# Altium PCB AltiumDesigner - PCB.pcbdoc
Units mil, origin at the board's own origin, x right, y up, seen from the top; angles counter-clockwise.
Board outline 3309.84 x 2688.34 mil, 2 copper layers (Top Layer, Bottom Layer); 69 components, 65 nets, 305 pads, 112 vias.
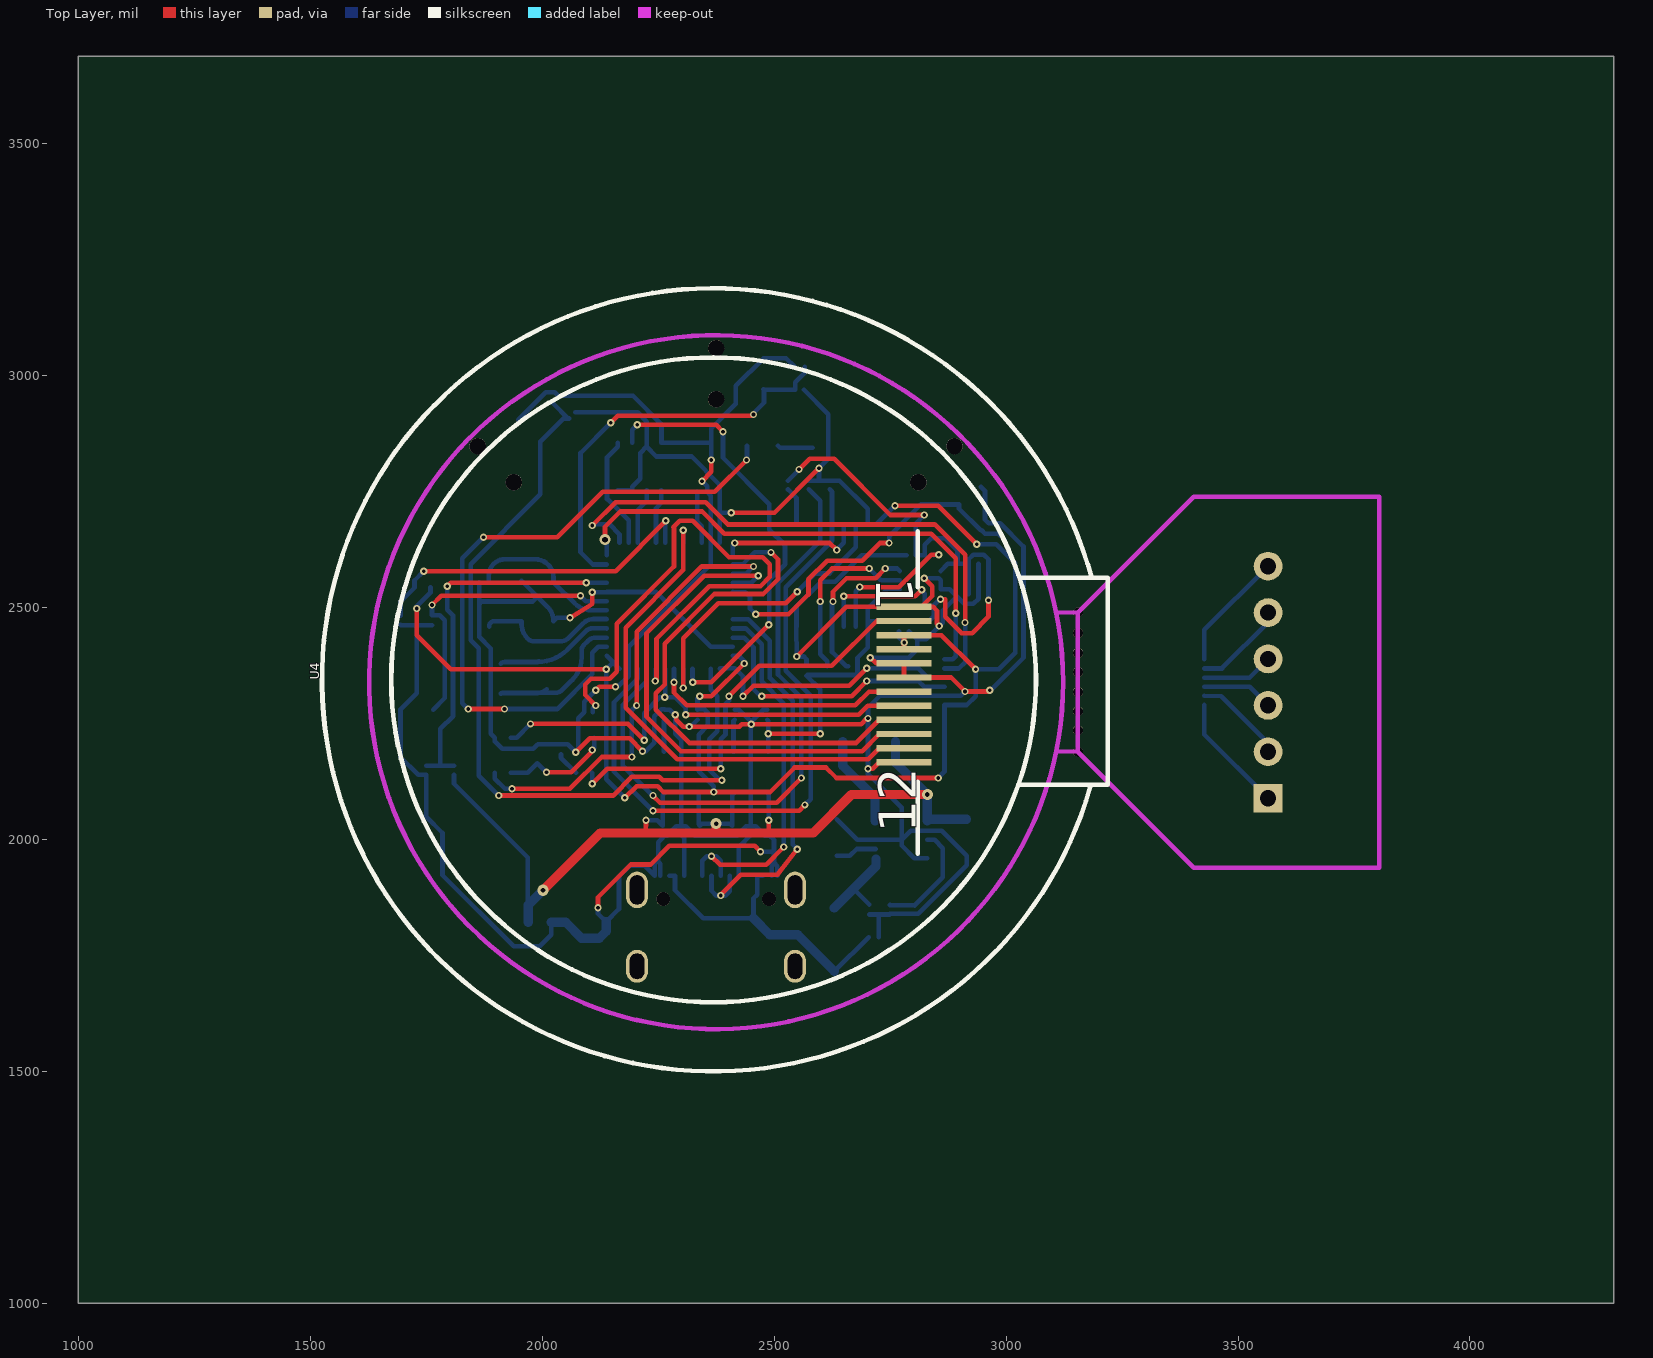
[diagram p0: Top Layer view]
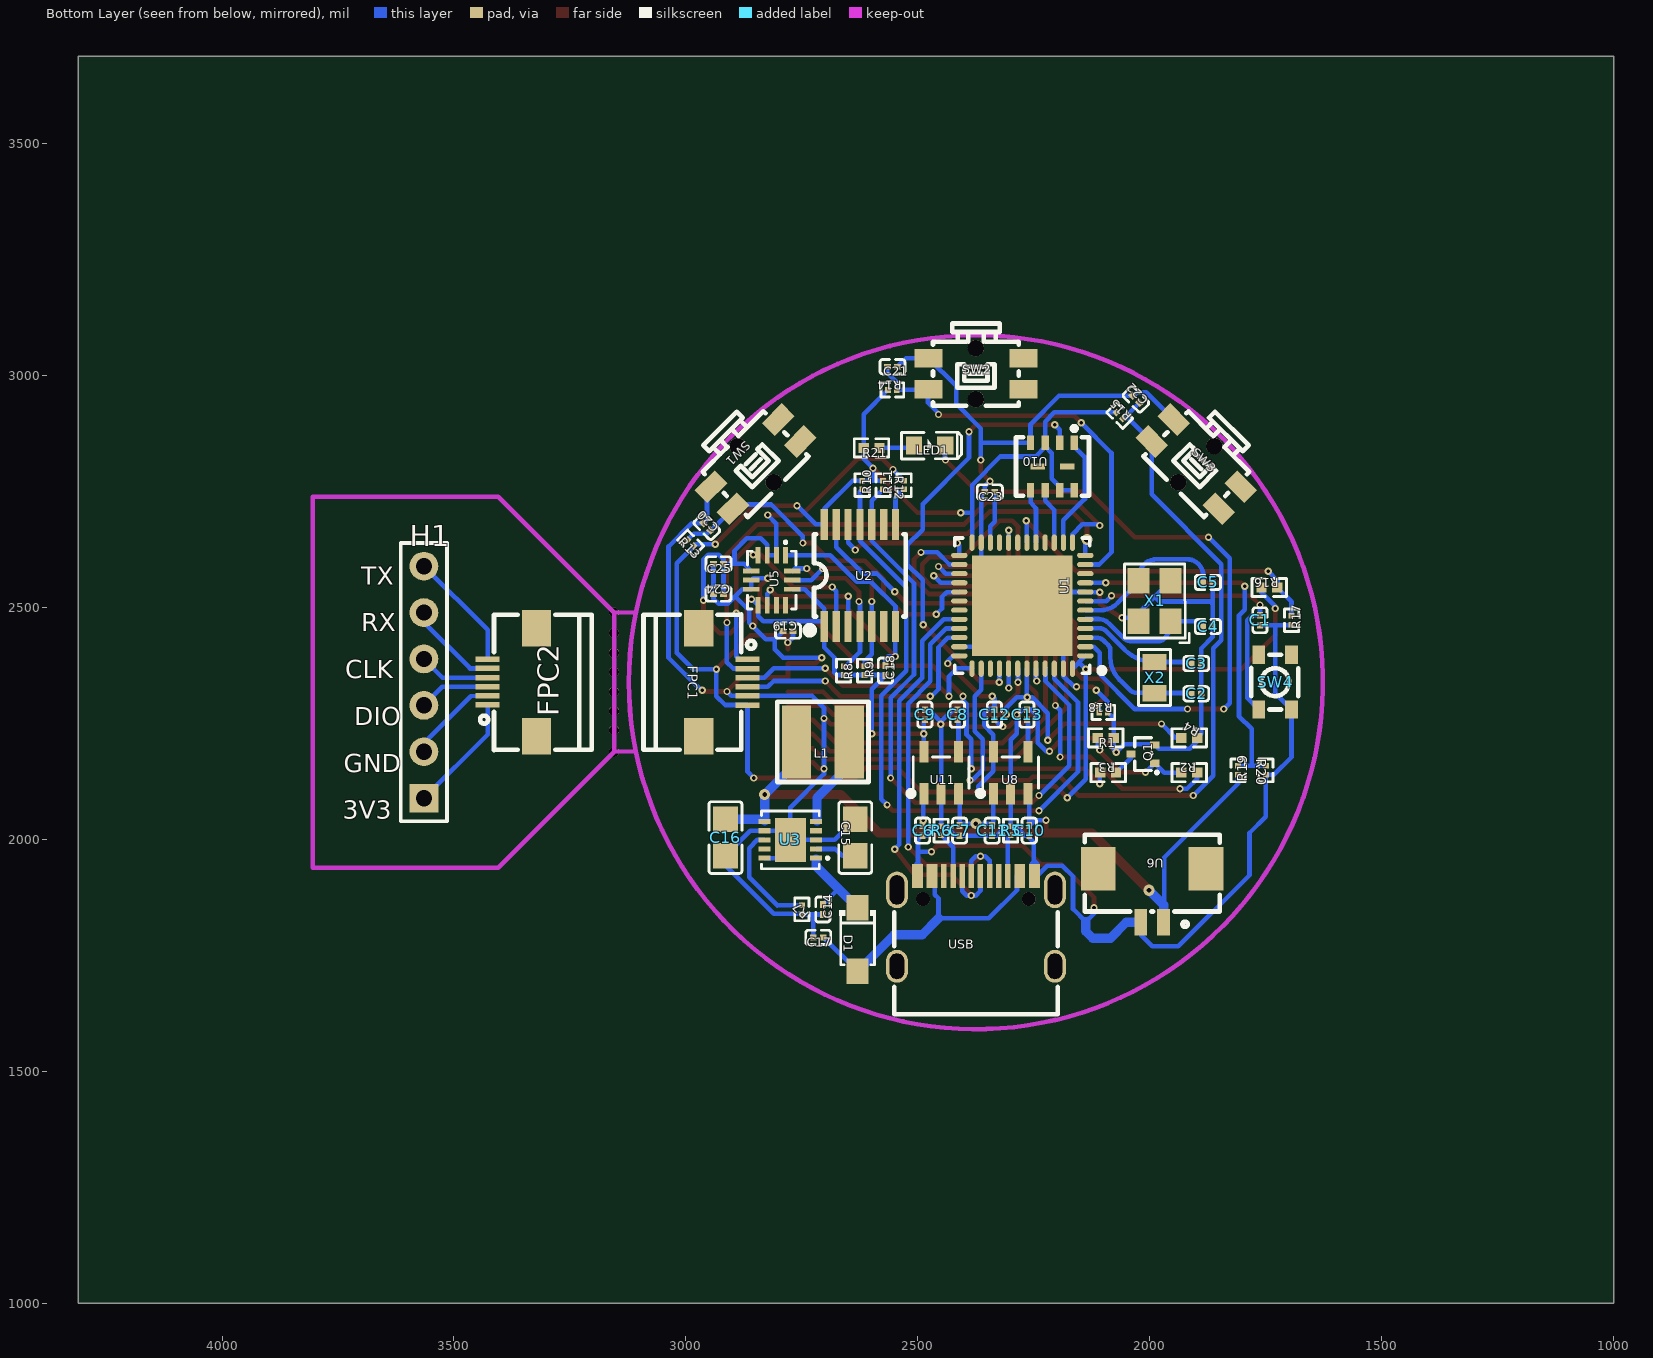
[diagram p1: Bottom Layer view, seen from below]

## Layer stack, top to bottom
Top Layer: signal copper (thickness not stored)
Dielectric: dielectric 12.6, FR-4, Dk 4.8
Bottom Layer: signal copper (thickness not stored)

## Board outline
4309.84,1000 1000,1000 1000,3688.34 4309.84,3688.34

## Components (designator, comment, footprint, x,y, rotation, side; value= is the part's Value field where it differs from the comment)
C1 "100nF" C0201 1762.48,2472.72 r270 bottom
C2 "9pF" C0201 1899.84,2314.16 r180 bottom
C3 "9pF" C0201 1899.84,2379.16 r180 bottom
C4 "20pf" C0201 1874.84,2459.16 r180 bottom
C5 "20pf" C0201 1874.84,2554.16 r180 bottom
C6 "1u" C0201 2489.84,2019.16 r270 bottom
C7 "1u" C0201 2409.84,2019.16 r270 bottom
C8 "1u" C0201 2414.84,2269.16 r90 bottom
C9 "1u" C0201 2484.84,2269.16 r90 bottom
C10 "1u" C0201 2259.84,2019.16 r270 bottom
C11 "1u" C0201 2339.84,2019.16 r270 bottom
C12 "1u" C0201 2334.84,2269.16 r270 bottom
C13 "22nf" C0201 2264.84,2269.16 r270 bottom
C14 "0.1u" C0201 2704.84,1849.16 r270 bottom
C15 "47u" C0805 2634.84,2004.16 r90 bottom
C16 "10u" C0805 2914.84,2004.16 r270 bottom
C17 "2.2u" C0201 2714.84,1789.16 r0 bottom
C18 "100nf" C0201 2569.84,2364.16 r270 bottom
C19 "100nf" C0201 2779.84,2449.16 r180 bottom
C20 "0.1u" C0201 2954.84,2674.16 r225 bottom
C21 "0.1u" C0201 2554.84,3019.16 r0 bottom
C22 "0.1u" C0201 2029.84,2949.16 r225 bottom
C23 "4.7u" C0201 2344.84,2749.16 r0 bottom
C24 "100nf" C0201 2929.84,2529.16 r180 bottom
C25 "100nf" C0201 2929.84,2594.16 r0 bottom
D1 "MBR230LSFT1G" SOD-123FL_L2.7-W1.8-LS3.8-RD 2629.84,1784.16 r90 bottom
FPC1 "AFC01-S06FCA-00" FPC-SMD_P0.50-6P_AFC01-S06FCA-00 2919.84,2339.16 r90 bottom
FPC2 "AFC01-S06FCA-00" FPC-SMD_P0.50-6P_AFC01-S06FCA-00 3374.84,2339.16 r270 bottom
H1 "HDR-F-2.54_1x6" HDR-F-2.54_1X6 3564.84,2289.16 r270 bottom
L1 "2.2uH" IND-SMD_L4.0-W4.0_VLCF4024-2 2704.96,2210.64 r0 bottom
LED1 "LED-0603_G" LED0603_GREEN 2474.84,2849.16 r0 bottom
Q1 "DMG1012T-7" SOT-523-3_L1.6-W0.8-P1.00-LS1.6-BR 2014.84,2184.16 r0 bottom
R1 "10kΩ" R0402 2094.84,2219.16 r180 bottom
R2 "1K" R0402 1914.84,2144.16 r180 bottom
R3 "10Ω" R0402 2089.84,2144.16 r180 bottom
R4 "10kΩ" R0402 1914.84,2219.16 r0 bottom
R5 "5.1K" R0201 2299.84,2019.16 r90 bottom
R6 "5.1K" R0201 2449.84,2019.16 r90 bottom
R7 "100k" R0201 2749.84,1849.16 r270 bottom
R8 "10k" R0201 2659.84,2364.16 r270 bottom
R9 "10k" R0201 2614.84,2364.16 r270 bottom
R10 "10k" R0201 2619.84,2764.16 r270 bottom
R11 "10k" R0201 2574.84,2764.16 r270 bottom
R12 "10k" R0201 2529.84,2764.16 r90 bottom
R13 "10k" R0201 2989.84,2639.16 r45 bottom
R14 "10k" R0201 2554.84,2969.16 r180 bottom
R15 "10k" R0201 2064.84,2914.16 r225 bottom
R16 "0" R0402 1742.32,2543.28 r180 bottom
R17 "10k" R0201 1694.44,2472.72 r270 bottom
R18 "5.1k" R0201 2099.84,2274.16 r180 bottom
R19 "100k" R0201 1809.84,2149.16 r270 bottom
R20 "100k" R0201 1749.84,2149.16 r90 bottom
R21 "550" R0402 2599.84,2844.16 r0 bottom
SW1 "EVQPUD02K" SW-SMD_EVQPUD02K-1 2849.84,2809.16 r225 bottom
SW2 "EVQPUD02K" SW-SMD_EVQPUD02K-1 2374.84,3004.16 r270 bottom
SW3 "EVQPUD02K" SW-SMD_EVQPUD02K-1 1899.84,2809.16 r315 bottom
SW4 "PTS830GM140SMTRLFS" KEY-SMD_4P-L3.0-W2.6-P1.80-LS3.5 1729.84,2339.16 r270 bottom
U1 "STM32F411CEU6" UFQFPN-48_L7.0-W7.0-P0.50-BL-EP 2274.84,2504.16 r270 bottom
U2 "LSF0204PWR" TSSOP-14_L5.0-W4.4-P0.65-LS6.4-BL 2624.84,2569.16 r0 bottom
U3 "ETA6096" TDFN-10_L3.0-W3.0-P0.50-BL-EP 2774.84,1999.16 r270 bottom
U4 "1.28‘’-12P-GC9A01" 1.28‘’-12P-GC9A01 2419.84,2334.16 r90 top
U5 "QMI8658C" LGA-14_L3.0-W2.5-P0.50-BR 2814.84,2559.16 r270 bottom
U6 "1.25MM*2P_W" CONN-SMD_1.25MM-2P_W 1994.84,1879.16 r180 bottom
U8 "RT9193-33GB" SOT-23-5_L3.0-W1.7-P0.95-LS2.8-BL 2299.84,2144.16 r0 bottom
U10 "W25Q32JVUUIQ" USON-8_L4.0-W3.0-P0.80-BL_WINBOND_UU 2209.84,2804.16 r180 bottom
U11 "TPRT9193-18GB" SOT-23-5_L3.0-W1.7-P0.95-LS2.8-BL 2449.84,2144.16 r0 bottom
USB "TYPE-C-31-M-12" USB-C_SMD-TYPE-C-31-M-12 2374.84,1824.16 r0 bottom
X1 "25MHz" OSC-SMD_4P-L3.2-W2.5-BL 1989.84,2514.16 r270 bottom
X2 "32.768kHz" OSC-SMD_L2.0-W1.2 1989.84,2349.16 r270 bottom

## Footprints (in the part's own frame and the unit in brackets; to place one, negate y for a bottom-side part, rotate by r counter-clockwise, add the part's x,y. Pads: shape width x height; smd on the part's side, far side on the other; paste and mask are expansions set on the pad)
1.28‘’-12P-GC9A01 [mm]
  rect 0.35x3 smd: 1(4.249,-9.144) 2(3.475,-9.144) 3(2.702,-9.144) 4(1.928,-9.144) 5(1.155,-9.144) 6(0.381,-9.144) 7(-0.393,-9.144) 8(-1.166,-9.144) 9(-1.94,-9.144) 10(-2.713,-9.144) 11(-3.487,-9.144) 12(-4.26,-9.144)
  silkscreen extent -21.18,-20.31 21.7,22.72
C0201 [mil]
  rect 14.51x12.76 smd: 1(10.8,0) 2(-10.8,0)
  silkscreen extent -27,-15 27,15
C0805 [mm]
  rect 1.41x1.35 smd: 1(1,0) 2(-1,0)
  silkscreen extent -1.96,-0.9 1.96,0.9
CONN-SMD_1.25MM-2P_W [mm]
  rect 0.7x1.45 smd: 1(0.625,-1.468) 2(-0.625,-1.468)
  rect 1.9x2.4 smd: 3(2.95,1.467) 4(-2.95,1.467)
  silkscreen extent -3.7,-1.71 3.7,3.33
FPC-SMD_P0.50-6P_AFC01-S06FCA-00 [mm]
  rect 0.3x1.3 smd: 1(1.248,-1.339) 2(0.748,-1.339) 3(0.248,-1.339) 4(-0.252,-1.339) 5(-0.752,-1.339) 6(-1.252,-1.339)
  rect 2x1.6 smd: 7(2.95,1.339) 8(-2.95,1.339)
  silkscreen extent -3.7,-1.75 3.72,4.36
HDR-F-2.54_1X6 [mil]
  rect 62x62 hole 35: 1(200,0)
  round 62 hole 35: 2(100,0) 3(0,0) 4(-100,0) 5(-200,0) 6(-300,0)
  silkscreen extent -350,-50 250,50
IND-SMD_L4.0-W4.0_VLCF4024-2 [mm]
  rect 1.6x4 smd: 1(1.445,0) 2(-1.445,0)
  silkscreen extent -2.5,-2.2 2.5,2.2
KEY-SMD_4P-L3.0-W2.6-P1.80-LS3.5 [mm]
  rect 1x0.7 smd: 1(1.5,-0.9) 2(-1.5,-0.9) 3(1.5,0.9) 4(-1.5,0.9)
  silkscreen extent -1.5,-1.3 1.5,1.27
LED0603_GREEN [mm]
  rect 0.9x1 smd: 1(0.85,0) 2(-0.85,0)
  silkscreen extent -1.75,-0.73 1.54,0.73
LGA-14_L3.0-W2.5-P0.50-BR [mm]
  rect 0.9x0.27 smd: 1(-1.37,0.75) 2(-1.37,0.25) 3(-1.37,-0.25) 4(-1.37,-0.75) 8(1.37,-0.75) 9(1.37,-0.25) 10(1.37,0.25) 11(1.37,0.75)
  rect 0.27x0.9 smd: 5(-0.5,-1.12) 6(0,-1.12) 7(0.5,-1.12) 12(0.5,1.12) 13(0,1.12) 14(-0.5,1.12)
  silkscreen extent -2.14,-1.33 1.58,1.33
OSC-SMD_4P-L3.2-W2.5-BL [mm]
  rect 1.4x1.2 smd: 1(1.1,0.875) 2(-1.1,0.875) 3(-1.1,-0.875) 4(1.1,-0.875)
  silkscreen extent -2.03,-1.65 2.29,1.9
OSC-SMD_L2.0-W1.2 [mm]
  rect 0.9x1.3 smd: 1(0.85,0) 2(-0.85,0)
  silkscreen extent -1.53,-0.88 1.53,0.88
R0201 [mil]
  rect 11.93x12.76 smd: 1(9.51,0) 2(-9.51,0)
  silkscreen extent -24,-15 24,15
R0402 [mm]
  rect 0.566x0.54 smd: 1(0.433,0) 2(-0.433,0)
  silkscreen extent -0.94,-0.5 0.94,0.5
SOD-123FL_L2.7-W1.8-LS3.8-RD [mm]
  rect 1.4x1.2 smd: 1(1.735,0) 2(-1.735,0)
  silkscreen extent -1.38,-1 1.6,1
SOT-23-5_L3.0-W1.7-P0.95-LS2.8-BL [mm]
  rect 0.49x1.157 smd: 1(0.95,1.154) 2(0,1.154) 3(-0.95,1.154)
  rect 0.49x1.175 smd: 4(-0.95,-1.154) 5(0.95,-1.154)
  silkscreen extent -1.53,-0.85 1.8,1.29
SOT-523-3_L1.6-W0.8-P1.00-LS1.6-BR [mm]
  rect 0.51x0.4 smd: 1(-0.65,0.5) 2(-0.65,-0.5) 3(0.65,0)
  silkscreen extent -0.83,-0.9 0.45,1.08
SW-SMD_EVQPUD02K-1 [mm]
  rect 1x1.55 smd: 1(0.85,-2.6) 2(-0.85,-2.6) 3(0.85,2.6) 4(-0.85,2.6)
  round 0.9 hole 0.9 unplated: ""(-1.4,0) ""(1.4,0)
  silkscreen extent -2.75,-2.35 1.75,2.35
TDFN-10_L3.0-W3.0-P0.50-BL-EP [mm]
  rect 0.28x0.665 smd: 1(1,1.407) 2(0.5,1.407) 3(0,1.407) 4(-0.5,1.407) 5(-1,1.407) 6(-1,-1.407) 7(-0.5,-1.407) 8(0,-1.407) 9(0.5,-1.407) 10(1,-1.407)
  rect 2.4x1.7 smd: 11(0,0)
  silkscreen extent -1.58,-1.58 1.58,2.11
TSSOP-14_L5.0-W4.4-P0.65-LS6.4-BL [mm]
  rect 0.4x1.7 smd: 1(1.95,2.8) 2(1.3,2.8) 3(0.65,2.8) 4(0,2.8) 5(-0.65,2.8) 6(-1.3,2.8) 7(-1.95,2.8) 8(-1.95,-2.8) 9(-1.3,-2.8) 10(-0.65,-2.8) 11(0,-2.8) 12(0.65,-2.8) 13(1.3,-2.8) 14(1.95,-2.8)
  silkscreen extent -2.5,-2.25 2.95,3.2
UFQFPN-48_L7.0-W7.0-P0.50-BL-EP [mm]
  oval 0.28x0.9 smd: 1(2.751,3.449) 2(2.25,3.449) 3(1.75,3.449) 4(1.25,3.449) 5(0.749,3.449) 6(0.249,3.449) 7(-0.249,3.449) 8(-0.749,3.449) 9(-1.25,3.449) 10(-1.75,3.449) 11(-2.251,3.449) 12(-2.751,3.449) 25(-2.751,-3.449) 26(-2.251,-3.449) 27(-1.75,-3.449) 28(-1.25,-3.449) 29(-0.749,-3.449) 30(-0.249,-3.449) 31(0.249,-3.449) 32(0.749,-3.449) 33(1.25,-3.449) 34(1.75,-3.449) 35(2.25,-3.449) 36(2.751,-3.449)
  oval 0.9x0.28 smd: 13(-3.449,2.751) 14(-3.449,2.25) 15(-3.449,1.75) 16(-3.449,1.25) 17(-3.449,0.749) 18(-3.449,0.249) 19(-3.449,-0.249) 20(-3.449,-0.749) 21(-3.449,-1.25) 22(-3.449,-1.75) 23(-3.449,-2.25) 24(-3.449,-2.751) 37(3.449,-2.751) 38(3.449,-2.25) 39(3.449,-1.75) 40(3.449,-1.25) 41(3.449,-0.749) 42(3.449,-0.249) 43(3.449,0.249) 44(3.449,0.749) 45(3.449,1.25) 46(3.449,1.75) 47(3.449,2.25) 48(3.449,2.751)
  rect 5.5x5.5 smd: 49(0,0)
  silkscreen extent -3.7,-3.7 3.7,4.5
USB-C_SMD-TYPE-C-31-M-12 [mm]
  oval 1.2x2 hole 0.8 slot 1.6 at 90 deg: 0(4.325,-1.706) 1(-4.325,-1.706)
  oval 1.2x1.8 hole 0.8 slot 1.4 at 90 deg: 2(-4.325,2.474) 3(4.325,2.474)
  rect 0.3x1.3 smd: A1(3.35,-2.474) A4(2.55,-2.474) A5(1.25,-2.474) A6(0.25,-2.474) A7(-0.25,-2.474) A8(-1.25,-2.474) A9(-2.55,-2.474) A12(-3.35,-2.474) B1(-3.05,-2.474) B4(-2.25,-2.474) B5(-1.75,-2.474) B6(-0.75,-2.474) B7(0.75,-2.474) B8(1.75,-2.474) B9(2.25,-2.474) B12(3.05,-2.474)
  round 0.75 hole 0.75 unplated: ""(-2.9,-1.206) ""(2.9,-1.206)
  silkscreen extent -4.47,-0.49 4.47,5.09
USON-8_L4.0-W3.0-P0.80-BL_WINBOND_UU [mm]
  rect 0.4x0.8 smd: 1(1.2,1.3) 2(0.4,1.3) 3(-0.4,1.3) 4(-1.2,1.3) 5(-1.2,-1.3) 6(-0.4,-1.3) 7(0.4,-1.3) 8(1.2,-1.3)
  rect 0.8x0.35 smd: 9(0.802,0) 10(-0.798,0)
  silkscreen extent -2,-1.6 2,2.21

## Free pads (board coordinates)
  round 21.65 hole 21.65 unplated: ""(3154.84,2189.16) ""(3154.84,2235.32) ""(3154.84,2276.32) ""(3154.84,2318.32) ""(3154.84,2361.32) ""(3154.84,2402.32) ""(3154.84,2445.32) ""(3154.84,2489.16)

## Via types
v1: diameter 15.75, hole 7.87, Top Layer to Bottom Layer, tented both sides, 103 vias
v2: diameter 15.77, hole 7.87, Top Layer to Bottom Layer, tented both sides, 5 vias
v3: diameter 24, hole 10, Top Layer to Bottom Layer, tented both sides, 3 vias
v4: diameter 24, hole 12, Top Layer to Bottom Layer, tented both sides, 1 vias

## Nets (pads, with @x,y where several pads share a name; then routed paths per layer and width w, separated by ;. In a path a pad name is that pad's centre, name@x,y a point inside that pad or via, vN(x,y) a via of type N, cw(c..) or ccw(c..) an arc to the next point about the centre after c; other vN are vias at no path point)
1V8: C9.2 C18.1 C24.1 C25.2 R8.1 R9.1 R12.1 U2.1 U5.2 U5.3 U5.5 U5.8 U5.12 U11.5 | length 1967.4
  Top Layer w10: v1(2487.24,2228.13) 2487.4,2228.28 v1(2599.12,2228.28) ; v1(2553.76,2797.8) 2576.44,2820.49 2629.36,2820.49 2750.32,2699.52 v1(2823.4,2699.52) ; v1(2858.68,2518.08) 2868.76,2518.08 2868.76,2480.28 2904.04,2445 2926.72,2445 2962,2480.29 v1(2962,2515.56)
  Bottom Layer w10: C9.2 2487.24,2255.96 v1(2487.24,2228.13) U11.5 ; R12.1 2553.76,2797.59 v1(2553.76,2797.8) ; v1(2599.12,2228.28) 2599.12,2324.08 C18.1 2571.13,2354.65 R9.1 R8.1 2675.09,2354.65 2679.76,2359.32 2679.76,2392.08 2701.61,2413.93 U2.1 ; U5.12 2744.04,2539.46 2701.64,2497.06 2701.64,2458.96 2702.84,2460.16 2702.84,2470.16 2833.44,2470.16 2844.34,2481.06 U5.8@2844.34,2505.26 ; v1(2823.4,2699.52) 2805,2681.13 U5.2 U5.3 ; U5.3@2824.64,2613.06 2824.64,2635.26 2838.54,2649.16 2868.74,2649.16 2895.24,2622.66 2895.24,2594.16 ; U5.8 2857.23,2518.08 v1(2858.68,2518.08) ; U5.5 2874.26,2594.16 C25.2 ; C24.1 C25.2 ; v1(2962,2515.56) 2962.04,2603.76 2951.94,2613.86 2929.24,2613.86 2919.04,2603.66 C25.2
3V3: C12.2 C19.1 FPC1.6 R10.2 R11.2 R13.2 R14.2 R15.2 R16.2 R21.1 U1.1 U1.24 U1.36 U1.48 U2.14 U4.3 U4.4 U8.5 U10.3 U10.7 U10.8 | length 4605.1
  Top Layer w10: v1(1729.72,2497.92) 1729.72,2439.96 1802.8,2366.88 2137.77,2366.88 v1(2137.96,2367.07) ; v1@2178.24,2089.66 2203.44,2114.86 2248.84,2114.86 2261.44,2102.26 v1(2369.8,2102.28) ; v1(2339.56,2308.92) 2364.76,2308.92 v1(2435.32,2379.48) ; v1(2369.8,2102.28) 2491.09,2102.28 2544.01,2155.2 2611.72,2155.2 2634.4,2132.52 v1(2853.64,2132.52) ; v1(2407.6,2704.56) 2500.84,2704.56 v1(2596.6,2800.32) ; v1(2760.4,2719.68) 2853.64,2719.68 v1(2936.8,2636.52) ; U4.4 U4.3 2860.64,2440.52 v1(2934.28,2366.88)
  Bottom Layer w10: v1@1729.74,2497.96 1729.74,2502.96 1759.34,2532.56 R16.2@1759.34,2543.26 ; R15.2@2071.54,2920.86 2206.04,2921.26 2225.54,2900.56 U10.3@2225.54,2855.36 ; U1.1 U1.48 ; 2152.9,2382.01 v1(2137.96,2367.07) 2137.96,2130 v1(2178.28,2089.68) ; U10.8 U10.7 ; U10.7 2194.14,2760.66 2211.04,2777.66 2211.04,2833.06 2225.54,2847.66 U10.3@2225.54,2855.36 ; U8.5 2337.24,2147.46 2369.84,2114.86 v1(2369.8,2102.28) ; U8.5 2337.24,2225.96 2357.2,2245.92 2357.2,2273.64 2349.64,2281.2 2336.08,2281.2 C12.2 2334.84,2304.2 v1(2339.56,2308.92) ; U1.24 2383.14,2764.26 2321.94,2825.56 2246.34,2825.56 2225.54,2846.26 U10.3@2225.54,2855.36 ; 2383.14,2704.36 v1(2407.6,2704.56) ; U1.36 2423.98,2395.86 2435.32,2384.52 v1(2435.32,2379.48) ; R14.2 2616.88,2916.63 R21.1 2616.88,2820.6 v1(2596.6,2800.32) 2596.6,2774.11 2597.04,2773.67 ; R11.2 R10.2 2640.89,2773.67 2701.61,2712.95 U2.14 2720.12,2679.4 v1(2760.4,2719.68) ; C19.1 2769.04,2436.36 v1(2780.56,2424.84) ; v1(2853.64,2132.52) 2867.11,2145.99 FPC1.6 2915.23,2289.87 2934.28,2308.93 v1(2934.28,2366.88) ; v1@2934.24,2366.86 2984.64,2366.86 3019.94,2402.16 3019.94,2595.56 R13.2@2983.14,2632.46 ; v1(2936.8,2636.52) 2979.04,2636.52 R13.2
_GND: FPC2.2 H1.2 | length 197.7
  Bottom Layer w10: FPC2.2@3427.54,2309.66 3463.44,2308.96 3564.84,2207.56 H1.2
_PA2: FPC2.6 H1.6 | length 257.6
  Bottom Layer w10: FPC2.6 3427.57,2451.89 H1.6
_PA3: FPC2.5 H1.5 | length 199.4
  Bottom Layer w10: FPC2.5@3427.54,2368.76 3465.34,2368.76 3564.84,2468.26 H1.5
_SWCLK: FPC2.4 H1.4 | length 153.9
  Bottom Layer w10: FPC2.4@3427.54,2349.06 3524.74,2349.06 H1.4
_SWDIO: FPC2.3 H1.3 | length 153.8
  Bottom Layer w10: FPC2.3@3427.54,2329.36 3524.94,2329.06 H1.3
BAT_ADC: R19.2 R20.1 U1.9 | length 810.7
  Top Layer w10: v1(1795.24,2545.8) 1802.8,2553.36 v1(2095.12,2553.36)
  Bottom Layer w10: R20.1 R19.2 ; 1780.24,2158.66 1780.24,2238.46 1807.84,2266.06 1807.84,2482.76 1795.24,2495.36 v1(1795.24,2545.8) ; v1(2095.12,2553.36) U1.9
FPC2_1: FPC2.1 H1.1 | length 257.7
  Bottom Layer w10: FPC2.1 3427.57,2226.43 H1.1
GND: C1.1 C2.1 C3.1 C4.1 C5.1 C6.1 C7.1 C8.1 C9.1 C10.1 C11.1 C12.1 C13.2 C14.1 C15.1 C16.1 C17.1 C18.2 C19.2 C20.2 C21.2 C22.2 C23.1 C24.2 C25.1 FPC1.5 Q1.2 R1.1 R4.2 R5.1 R6.1 R7.1 R17.1 R18.1 R20.2 SW1.2 SW2.2 SW3.2 SW4.3 U1.8 U1.23 U1.35 U1.47 U1.49 U2.7 U3.3 U3.7 U3.10 U3.11 U4.1 U4.5 U4.6 U4.12 U5.1 U5.6 U5.7 U6.2 U8.2 U10.4 U11.2 USB.A1 USB.A12 USB.B1 USB.B12 X1.2 X1.4 | length 10314.7
  Top Layer w10: v1(2059.84,2477.76) 2107.74,2507.96 v1(2107.72,2533.2) ; v1(2072.44,2187.96) 2102.68,2218.2 2188.36,2218.2 v1(2216.08,2190.48) ; v1(2115.28,2321.52) 2122.84,2329.08 v1(2158.12,2329.08) ; v1(2120.32,1852.8) 2120.34,1875.46 2190.84,1946.06 2233.74,1946.06 2274.04,1986.36 2458.04,1986.36 v1(2470.6,1973.76) ; v1(2286.64,2268.6) 2289.16,2266.08 2289.16,2258.54 2304.3,2243.4 v1(2316.88,2243.4) 2425.24,2243.4 2430.28,2248.44 v1(2450.44,2248.44) 2687.34,2248.46 2699.94,2261.06 v1@2702.44,2261.06 ; v1(2344.6,2772.6) 2364.76,2792.76 2364.76,2810.4 v1(2364.76,2817.96) ; v1(2548.72,2394.6) 2655.54,2501.46 U4.1@2779.84,2501.46 ; v1(2702.44,2152.68) 2712.54,2152.66 2726.24,2166.46 U4.12@2779.84,2166.46 ; v1(2707.48,2392.08) 2719.95,2379.61 U4.5 U4.6 2881.44,2349.16 v1(2911.6,2319) 2962,2319 v1(2964.52,2321.52) ; v1@2823.44,2563.46 2841.04,2545.76 2841.04,2524.86 2817.64,2501.46 U4.1@2779.84,2501.46 ; v1(2856.16,2460.12) 2851.12,2465.16 2851.12,2492.88 2842.57,2501.43 U4.1
  Bottom Layer w10: SW4.3 1729.71,2315.41 1729.71,2461.92 ; SW4.3 1694.44,2177.86 1732.64,2139.66 R20.2 1749.84,2049.36 1785.14,2014.06 1785.14,1923.36 1938.84,1769.66 1994.34,1769.66 2019.44,1794.76 U6.2 ; R17.1 1695.73,2461.92 C1.1 ; 1864.04,2507.48 1869.6,2513.04 1979.2,2513.04 1988.55,2522.39 1988.55,2524.33 ; C5.1 C4.1 1864.04,2436.68 1889.04,2411.68 C3.1 C2.1 1889.04,2227.92 R4.2 ; R4.2 1897.84,2211.36 1913.64,2195.56 1980.94,2195.56 1989.24,2203.86 1991.01,2205.6 2054.8,2205.6 v1(2072.44,2187.96) 2077.8,2193.32 R1.1 2077.8,2261.63 R18.1 2090.33,2296.58 v1(2115.28,2321.52) ; SW3.2@1948.54,2905.16 2007.44,2964.16 2027.04,2964.16 2034.44,2956.76 C22.2@2037.44,2956.76 ; X1.2 2011.76,2501.12 cw(c1981.49,2470.85) X1.4 ; X1.4 2031.24,2477.76 v1(2059.84,2477.76) ; C22.2 2195.69,2956.79 2257.08,2895.4 U10.4 ; v1(2107.72,2533.2) 2138.58,2533.2 U1.8 2245.35,2533.66 U1.49 ; v1(2120.32,1852.8) 2120.32,1840.19 2137.94,1822.57 2165.64,1850.26 2165.64,1920.86 2188.34,1943.56 2221.04,1943.56 2242.94,1921.56 2242.95,1948.21 2249.84,1955.1 ; v1(2158.12,2329.08) 2163.16,2329.08 2186.24,2352.16 U1.47 2186.24,2415.57 U1.49 ; v1@2216.04,2190.46 2223.64,2190.46 2241.24,2208.16 2241.24,2266.06 2256.44,2281.16 2263.64,2281.16 C13.2 2275.28,2279.97 v1(2286.64,2268.6) ; USB.B1@2254.74,1921.56 2254.74,1947.66 2249.84,1952.56 2249.84,1994.16 2259.84,2004.16 C10.1 2269.04,2008.36 2289.35,2028.67 R5.1 ; U10.4@2257.04,2855.36 2364.74,2855.36 2364.74,2817.96 2364.74,2885.96 2417.64,2938.96 2417.64,2978.06 SW2.2@2477.24,3037.66 ; v1(2286.64,2268.6) 2286.64,2228.26 2299.84,2215.06 2299.84,2098.76 R5.1 ; v1(2316.88,2243.4) 2319.88,2243.4 C12.1 ; v1(2344.6,2772.6) 2355.64,2761.56 C23.1 2363.44,2741.36 U1.23 2363.44,2592.77 U1.49 ; U1.35 2363.45,2415.56 U1.49 ; C8.1 2423.94,2279.96 v1@2450.44,2253.46 ; v1(2470.6,1973.76) 2478.16,1973.76 2498.13,1973.76 2499.84,1975.48 ; SW2.2 2525.58,3037.62 C21.2 ; C9.1 2476.94,2279.96 v1@2450.44,2253.46 ; USB.B12 2494.94,1944.26 2499.84,1949.16 2499.84,1999.16 C6.1 2480.64,2008.36 2460.33,2028.67 R6.1 ; 2499.84,1959.36 2499.84,1949.56 2506.74,1942.66 USB.A1 ; U2.7 2548.07,2502.31 2601.64,2555.88 2631.88,2555.88 2689.09,2613.09 U5.1 ; U2.7@2548.04,2458.96 v1(2548.72,2394.6) ; v1(2548.72,2394.6) 2563.84,2394.6 2569.84,2388.6 C18.2 ; C15.1@2634.84,2043.56 2679.44,1999.16 U3.3 U3.11 ; C14.1 2748.55,1838.36 R7.1 2810.25,1839.65 2914.84,1944.24 C16.1 ; v1(2707.48,2392.08) 2790.64,2392.08 2808.28,2409.72 2808.28,2431.52 ; C17.1@2725.14,1789.16 2725.14,1838.36 ; C19.2 2808.28,2431.52 ; v1(2823.4,2563.44) 2854.66,2563.44 U5.6 U5.7 2878.24,2539.46 2909.74,2507.96 2929.24,2507.96 2940.64,2519.36 C24.2 C25.1 ; U3.10@2830.24,1959.76 2802.14,1959.76 2774.84,1987.06 U3.11 ; v1(2856.16,2460.12) 2827.56,2431.52 2808.28,2431.52 ; v1@2856.14,2460.16 2863.74,2467.66 2863.74,2493.66 2893.84,2523.86 ; FPC1.5 2728.27,2309.55 2702.44,2283.72 v1(2702.44,2261.04) 2702.44,2141.24 2774.84,2068.84 U3.11 ; FPC1.5 2902.14,2309.56 v1(2911.6,2319) ; C16.1 2861.44,2018.86 2830.24,2018.86 2794.52,2018.84 U3.11 ; SW1.2@2945.84,2760.46 2954.44,2751.86 2954.44,2689.86 C20.2@2962.44,2681.76 ; C20.2 2987.29,2681.79 3037.6,2631.48 3037.6,2392.08 2967.04,2321.52 v1(2964.52,2321.52) ; R5.1 2309.84,2028.67 2330.15,2008.36 C11.1 C7.1 2419.04,2008.36 2439.35,2028.67 R6.1 ; R6.1 U11.2 2449.84,2247.84 v1(2450.44,2248.44) ; v1@2450.44,2248.46 v1@2450.44,2253.46 ; v1@2450.44,2248.46 v1@2450.44,2253.46
  Bottom Layer w20: U6.2 2050.84,1821.36 2084.94,1787.26 2122.84,1787.26 2137.94,1802.36 2137.94,1822.56
LED1_1: LED1.1 R21.2 | length 76.6
  Bottom Layer w10: LED1.1 2513.31,2844.16 R21.2
LEDK: R3.2 U4.2 | length 923.3
  Top Layer w10: v1(2107.72,2119.92) 2140.48,2152.68 v1(2384.92,2152.68) ; v1@2402.54,2308.96 2468.04,2374.46 2624.34,2374.46 2720.84,2470.96 U4.2
  Bottom Layer w10: R3.2 2107.72,2143.33 v1(2107.72,2119.92) ; v1(2384.92,2152.68) 2384.92,2215.68 2395.04,2225.81 2395.04,2291.96 2402.56,2299.48 v1(2402.56,2308.92)
NRST: C1.2 SW4.1 U1.7 | length 647
  Top Layer w10: v1(1762.48,2505.48) 1782.64,2525.64 v1(2082.52,2525.64)
  Bottom Layer w10: C1.2@1762.44,2483.56 1779.44,2483.56 1790.24,2472.76 1790.24,2305.06 SW4.1@1765.24,2280.06 ; C1.2 v1(1762.48,2505.48) ; v1(2082.52,2525.64) 2094.2,2513.96 U1.7
PA1: C21.1 R14.1 SW2.1 U1.11 | length 880.4
  Top Layer w10: v1(2148.04,2898.6) 2163.16,2913.73 2188.36,2913.73 2452.96,2913.73 v1(2455.48,2916.24)
  Bottom Layer w10: U1.11 2108.64,2592.77 2082.52,2618.88 2082.52,2833.09 v1(2148.04,2898.6) ; v1(2455.48,2916.24) 2455.48,2918.76 2478.16,2941.44 2478.16,2969.73 SW2.1 2478.73,2969.16 R14.1 2545.33,2985.93 2565.64,3006.24 C21.1
PA2: FPC1.1 U1.12 | length 1113.3
  Top Layer w10: v4(2135.44,2646.6) 2135.44,2674.36 2168.24,2707.06 2344.62,2707.06 2392.52,2659.16 2838.54,2659.16 2891.44,2606.27 v2(2891.44,2487.84)
  Bottom Layer w10: v4(2135.44,2646.6) 2139.04,2643 U1.12 ; FPC1.1 2885.14,2388.3 2891.44,2394.6 v2(2891.44,2487.84)
PA3: FPC1.2 U1.13 | length 1240.6
  Top Layer w10: v2(2107.72,2676.84) 2158.12,2727.25 2352.16,2727.25 2400.26,2679.15 2846.36,2679.15 2911.6,2613.9 v2(2911.6,2467.68)
  Bottom Layer w10: v2@2107.74,2676.86 2110.24,2679.36 2145.54,2679.36 2166.54,2658.36 U1.13 ; FPC1.2 2898.21,2368.62 2911.6,2382 v2(2911.6,2467.68)
PA4: U1.14 U10.1 | length 244
  Bottom Layer w10: U10.1 2162.6,2846.92 2139.84,2824.16 2139.84,2734.16 2186.24,2687.76 U1.14
PA5: U1.15 U10.6 | length 121.2
  Bottom Layer w10: U1.15 2205.94,2710.26 2225.59,2729.91 U10.6
PA7: U1.17 U10.5 | length 117.6
  Bottom Layer w10: U1.17 2245.34,2713.66 2257.04,2726.36 U10.5@2257.04,2752.96
PA8: C20.1 R13.1 SW1.1 U1.29 | length 783.4
  Top Layer w10: v2@2460.54,2485.36 2531.04,2485.36 2573.94,2528.16 2573.94,2560.96 2614.24,2601.26 2689.84,2601.26 2727.64,2639.06 v2@2747.84,2639.06
  Bottom Layer w10: U1.29 2437.84,2533.16 2447.94,2523.16 2447.94,2507.96 ; 2447.92,2507.94 2447.92,2497.92 v2(2460.52,2485.32) ; v2@2747.84,2639.06 2747.84,2654.16 2815.84,2722.16 2898.54,2722.16 SW1.1@2898.54,2713.16 ; SW1.1 2945.14,2666.53 C20.1 2954.54,2659.2 2983.24,2659.2 R13.1
  other v2: 2747.8,2639.04
PA15: C22.1 R15.1 SW3.1 U1.38 | length 1752.8
  Top Layer w10: v1(1906.12,2094.72) 2153.1,2094.72 2193.44,2135.07 2252.54,2135.07 2260.12,2127.48 v1(2387.44,2127.48)
  Bottom Layer w10: v1(1906.12,2094.72) 1863.28,2137.56 1863.28,2412.25 1845.64,2429.88 1845.64,2593.69 1995.89,2743.94 SW3.1 2045.45,2907.44 R15.1 2056.3,2907.44 C22.1 ; U1.38 2363.44,2322.86 2377.34,2308.96 2377.34,2233.26 2359.74,2215.66 2359.74,2150.16 2382.44,2127.46 v1(2387.44,2127.48)
PB0: R16.1 R17.2 U1.18 | length 731.8
  Top Layer w10: v1(1744.84,2578.56) 2158.12,2578.56 v1(2266.48,2686.92)
  Bottom Layer w10: R17.2 1694.44,2512.44 R16.1 1724.68,2543.88 1724.68,2558.4 v1(1744.84,2578.56) ; U1.18 2265.04,2685.48 v1(2266.48,2686.92)
PB2: U1.20 U4.11 | length 1117
  Top Layer w10: v1(2304.28,2666.76) 2304.28,2581.08 2179.84,2456.64 2179.84,2284.16 2291.16,2172.84 2702.44,2172.84 2726.46,2196.86 U4.11
  Bottom Layer w10: v1(2304.28,2666.76) U1.20 U1.20
PB4: U1.40 U10.2 | length 965.3
  Top Layer w10: v1(2204.84,2894.16) 2374.84,2894.16 v1(2389.84,2879.16) ; v1(2324.44,2339.16) 2364.76,2339.16 v1(2488.24,2462.64)
  Bottom Layer w10: U10.2 2194.09,2883.41 v1(2204.84,2894.16) ; U1.40 2324.04,2349.97 2324.44,2349.56 v1(2324.44,2339.16) ; v1(2389.84,2879.16) 2389.84,2823.16 2489.84,2723.16 2489.84,2667.66 2523.54,2633.96 2523.54,2593.36 2489.84,2559.76 2489.84,2464.26 v1@2488.24,2462.66
PB5: U1.41 U2.13 | length 651.1
  Top Layer w10: v1(2304.28,2326.56) 2304.28,2433.6 2379.84,2509.16 2524.84,2509.16 v1(2549.84,2534.16)
  Bottom Layer w10: v1(2304.28,2326.56) v1(2304.28,2326.56) U1.41 ; v1(2549.84,2534.16) 2589.24,2573.56 2619.24,2573.56 2676.04,2630.36 U2.13
PB6: U1.42 U4.7 | length 571.4
  Top Layer w10: v1(2284.12,2339.16) 2284.12,2316.48 2311.44,2289.16 2674.84,2289.16 2704.44,2318.76 U4.7@2779.84,2318.76
  Bottom Layer w10: v1(2284.12,2339.16) 2284.12,2367.84 U1.42
PB7: R4.1 U1.43 U4.8 | length 1042.2
  Top Layer w10: v1(1974.84,2249.16) 2184.84,2249.16 v1(2219.84,2214.16) ; v1(2309.32,2268.6) 2682.28,2268.6 2701.94,2288.26 U4.8
  Bottom Layer w10: R4.1 1944.84,2219.16 v1(1974.84,2249.16) ; v1(2219.84,2214.16) 2219.84,2272.36 2253.84,2306.36 v1@2263.94,2306.36 ; U1.43 2265.04,2307.48 v1(2263.96,2306.4) 2286.64,2306.4 2309.32,2283.73 v1(2309.32,2268.6)
PB8: R11.1 U1.45 U2.10 | length 1361.3
  Top Layer w10: v1(2238.76,2094.72) 2253.88,2079.6 2505.88,2079.6 v1(2558.8,2132.52)
  Bottom Layer w10: U1.45@2224.84,2369.16 2224.84,2340.77 2174.04,2289.97 2174.04,2159.45 v1(2238.76,2094.72) ; v1(2558.8,2132.52) 2558.8,2305.2 2508.34,2355.66 2508.34,2552.67 2599.24,2643.56 U2.10@2599.24,2679.36 ; R11.1 2599.25,2730.25 U2.10
PB9: R10.1 U1.46 U2.11 | length 1446.3
  Top Layer w10: v1@2238.74,2061.96 2553.74,2061.96 v1@2566.34,2074.56
  Bottom Layer w10: U1.46 2205.94,2346.66 2154.84,2295.56 2154.84,2145.86 v1@2238.74,2061.96 ; v1(2566.36,2074.56) 2578.94,2087.14 2578.94,2310.07 2524.84,2364.16 2524.84,2544.16 2624.84,2644.16 U2.11 ; R10.1 2624.84,2749.66 U2.11
  other v1: 2238.76,2061.96
PB12: U1.25 U2.12 | length 316
  Top Layer w10: v1(2415.16,2639.04) 2619.96,2639.04 v1(2634.84,2624.16)
  Bottom Layer w10: U1.25 2410.64,2634.53 v1(2415.16,2639.04) ; v1(2634.84,2624.16) 2650.44,2639.76 U2.12
PB13: U1.26 U4.9 | length 1194.9
  Top Layer w10: v1(2493.28,2618.88) 2508.4,2603.76 2508.4,2560.92 2476.64,2529.16 2370.8,2529.16 2263.96,2422.33 2263.96,2334.13 2244.84,2315 2244.84,2280.17 2316.84,2208.16 2677.24,2208.16 2726.84,2257.77 U4.9
  Bottom Layer w10: U1.26 2431.84,2592.76 2458.04,2618.86 v1@2493.24,2618.86
PB14: R2.1 U1.27 | length 981.9
  Top Layer w10: v1(1934.84,2109.16) 2059.84,2109.16 2128.54,2177.86 v1(2193.4,2177.88) ; v1(2203.48,2288.76) 2203.48,2447.8 2344.32,2588.64 v1(2455.48,2588.64)
  Bottom Layer w10: R2.1 1897.84,2131.16 1919.84,2109.16 v1(1934.84,2109.16) ; v1(2193.4,2177.88) 2193.4,2278.68 v1(2203.48,2288.76) ; U1.27 2439.9,2573.06 v1(2455.48,2588.64)
PB15: U1.28 U4.10 | length 1133.8
  Top Layer w10: v1(2465.56,2568.48) 2349.16,2568.48 2224.84,2444.16 2224.84,2264.88 2299.24,2190.49 2689.84,2190.49 2726.72,2227.37 U4.10@2779.84,2227.37
  Bottom Layer w10: U1.28 2450.44,2553.36 v1(2465.56,2568.48)
PC13: LED1.2 U1.2 | length 1442.7
  Top Layer w10: v1(1840.6,2281.2) v1(1918.72,2281.2) ; v1(1873.36,2651.64) 2032.12,2651.64 2130.4,2749.92 2352.16,2749.92 2372.32,2749.92 v1(2440.36,2817.96)
  Bottom Layer w10: v1(1840.6,2281.2) 1828,2293.81 1828,2606.28 v1(1873.36,2651.64) ; v1(1918.72,2281.2) 2032.18,2281.2 2107.74,2356.76 2107.74,2402.16 2121.14,2415.56 U1.2 ; v1(2440.36,2817.96) 2441.38,2818.98 LED1.2
PC14: C2.2 U1.3 X2.1 | length 324.2
  Bottom Layer w10: C2.2 cw(c1914.36,2310.45) 1914.36,2315.7 X2.1 ; X2.1@2009.54,2323.86 cw(c1989.84,2343.56) X2.1 ; U1.3 cw(c2138.22,2436.09) 2138.22,2434.92 2115.28,2434.92 ccw(c2115.28,2410.59) 2098.07,2427.8 2090.08,2419.8 ccw(c2102.25,2407.64) 2085.04,2407.64 2085.04,2392.08 cw(c2018.12,2392.08) 2065.44,2344.76 2061.88,2341.2 2042.2,2321.52 cw(c2030.03,2333.69) 2030.03,2316.48 2019.52,2316.48 1991.73,2316.48 ccw(c1991.73,2313.82) X2.1
PC15: C3.2 U1.4 X2.2 | length 258.8
  Bottom Layer w10: C3.2 cw(c1919,2370.81) 1919,2382.62 X2.2 ; X2.2@1993.56,2384.16 ccw(c1993.56,2378.91) X2.2 ; U1.4 ccw(c2138.75,2454.67) 2138.75,2455.08 2107.72,2455.08 ccw(c2107.72,2436.83) 2094.82,2449.74 2067.4,2422.32 2054.47,2409.4 cw(c1989.84,2474.03) X2.2
PH0: C4.2 U1.5 X1.1 | length 308.9
  Bottom Layer w10: C4.2 cw(c1897.33,2459.16) 1897.33,2470.85 X1.1 1955.4,2465.53 ccw(c2002.25,2465.53) 1969.12,2432.4 ccw(c1981.29,2444.57) 1981.29,2427.36 1994.32,2427.36 2039.07,2427.36 ccw(c2039.07,2453.18) 2057.32,2434.92 2088.73,2466.33 cw(c2110.24,2444.83) 2110.24,2475.24 U1.5@2137.64,2475.24 ; U1.5@2137.64,2475.24 cw(c2137.64,2473.26) U1.5 ccw(c2137.64,2473.26) U1.5@2137.64,2475.24
PH1: C5.2 U1.6 X1.3 | length 344.7
  Bottom Layer w10: C5.2 cw(c1885.64,2554.96) 1884.84,2554.96 1884.84,2569.16 cw(c1919.84,2569.16) 1919.84,2604.16 1959.84,2604.16 1984.84,2604.16 cw(c1984.84,2564.7) 2024.3,2564.7 X1.3 ccw(c2030.99,2557.47) 2026.26,2552.75 2069.84,2509.16 ccw(c2105.57,2544.89) 2105.57,2494.36 U1.6
QMI_INT1: U2.2 U5.4 | length 298.8
  Top Layer w10: v1(2684.84,2544.16) 2768.84,2544.16 2838.84,2614.16 v1(2854.84,2614.16)
  Bottom Layer w10: U2.2 2676.02,2535.34 v1(2684.84,2544.16) ; U5.4 2845.44,2614.16 v1(2854.84,2614.16)
QMI_INT2: U2.3 U5.9 | length 275.5
  Top Layer w10: v1(2649.84,2524.16) 2804.28,2524.16 v1(2818.36,2538.24)
  Bottom Layer w10: v1(2649.84,2524.16) 2649.84,2459.52 U2.3 ; v1(2818.36,2538.24) 2818.36,2535.64 2824.68,2529.33 U5.9
QMI_SCL: R9.2 U2.5 U5.13 | length 383.9
  Top Layer w10: v1(2599.12,2513.04) 2599.12,2558.44 2624.84,2584.16 v1(2704.84,2584.16)
  Bottom Layer w10: v1(2599.12,2513.04) 2599.25,2512.92 U2.5@2599.25,2458.93 ; U2.5@2599.25,2458.92 2599.25,2399.75 2614.84,2384.16 R9.2 ; v1(2704.84,2584.16) 2729.84,2559.16 U5.13@2770.75,2559.16
QMI_SDA: R8.2 U2.4 U5.14 | length 345.4
  Top Layer w10: v1@2626.84,2513.06 2626.84,2534.26 2655.94,2563.46 2719.14,2563.46 v1(2739.84,2584.16)
  Bottom Layer w10: U2.4 2624.84,2404.16 2655.33,2373.67 R8.2 ; U2.4 2624.84,2511.04 v1(2626.84,2513.04) ; v1(2739.84,2584.16) 2765.43,2584.16 U5.14@2770.75,2578.84
R1_2: Q1.1 R1.2 R2.2 | length 241.5
  Top Layer w10: v1(2009.44,2145.12) 2062.36,2145.12 2107.72,2190.48 v1(2107.72,2193)
  Bottom Layer w10: R2.2 1968.94,2144.16 Q1.1 2008.6,2145.12 v1(2009.44,2145.12) ; v1(2107.72,2193) 2111.88,2197.16 R1.2
R3_1: Q1.3 R3.1 | length 53.4
  Bottom Layer w10: Q1.3 2040.43,2176.53 R3.1
R5_2: R5.2 USB.B5 | length 90.6
  Bottom Layer w10: R5.2 2305.94,2003.55 USB.B5
R12_2: R12.2 U2.8 | length 82.8
  Bottom Layer w10: R12.2 2548.07,2736.42 U2.8
S$42428: 
S$101704: 
S$101741: 
S$101745: 
SWCLK: FPC1.3 U1.37 | length 568.1
  Top Layer w10: v1(2432.79,2308.92) 2455.47,2331.61 2662.09,2331.61 v1(2699.88,2369.4)
  Bottom Layer w10: U1.37 2384.14,2369.36 2415.24,2369.36 2432.84,2351.76 v1@2432.84,2308.96 ; v1@2699.84,2369.36 2810.84,2369.36 2831.24,2348.96 FPC1.3@2867.14,2348.96
SWDIO: FPC1.4 U1.34 | length 580.7
  Top Layer w10: v1(2473.11,2308.92) 2667.12,2308.92 v1(2699.88,2341.68)
  Bottom Layer w10: U1.34 2410.99,2434.91 2435.31,2434.91 2455.47,2414.76 2455.47,2329.09 2455.47,2324.05 2470.6,2308.92 v1(2473.11,2308.92) ; v1@2699.84,2341.66 2810.84,2341.66 2823.24,2329.26 FPC1.4@2867.14,2329.26
U1_22: C23.2 U1.22 | length 113.2
  Bottom Layer w10: C23.2 2334.04,2684.96 2343.74,2675.26 U1.22
U1_44: R18.2 U1.44 | length 1213
  Top Layer w10: v1@2115.24,2288.76 2092.64,2311.46 2092.64,2334.16 2105.24,2346.76 2145.54,2346.76 2160.64,2361.86 2160.64,2465.16 2284.14,2588.66 2284.14,2671.76 2282.84,2673.06 2296.74,2686.96 2324.44,2686.96 2402.64,2608.76 2475.64,2608.76 2490.74,2593.66 2490.74,2565.96 2470.54,2545.76 2359.74,2545.76 2246.34,2432.36 2246.34,2344.16 v1(2243.8,2341.68)
  Bottom Layer w10: R18.2 2109.35,2282.83 v1(2115.28,2288.76) ; v1(2243.8,2341.68) 2245.34,2343.22 U1.44
U3_2: C15.2 U3.2 | length 90.7
  Bottom Layer w10: C15.2 2663.23,1964.79 2677.91,1979.47 U3.2
U3_5: L1.2 U3.5 | length 199
  Bottom Layer w20: L1.2 2648.07,2159.17 2717.55,2089.69 U3.5@2717.55,2040.41
U3_8: R7.2 U3.8 | length 242.8
  Bottom Layer w10: R7.2 2803.24,1857.86 2863.74,1918.36 2863.74,1981.36 2845.94,1999.16 U3.8@2830.24,1999.16
U8_4: C13.1 U8.4 | length 69.8
  Bottom Layer w10: U8.4 2262.44,2255.96 C13.1
U11_4: C8.2 U11.4 | length 69.8
  Bottom Layer w10: U11.4 2412.44,2255.96 C8.2
USB+: U1.33 USB.A6 USB.B6 | length 826.4
  Top Layer w10: v1(2364.84,1964.16) 2383.43,1945.58 2482.74,1945.58 v1(2521,1983.84)
  Bottom Layer w10: USB.B6 2345.31,1954.63 2354.84,1964.16 2374.84,1964.16 2384.68,1954.32 USB.A6 ; U1.33 2439.14,2454.97 2473.14,2420.96 2473.14,2340.86 2521,2293 v1(2521,1983.84)
USB-: U1.32 USB.A7 USB.B7 | length 893.5
  Top Layer w10: v1@2386.44,1882.16 2428.44,1924.16 2507.54,1924.16 v1(2549.84,1979.16)
  Bottom Layer w10: USB.A7 2365.04,1889.16 2375.04,1879.16 v1(2384.59,1879.16) 2394.84,1879.16 2404.34,1888.66 USB.B7@2404.34,1921.56 ; U1.32 2444.34,2474.66 2490.74,2428.26 2490.74,2348.26 2539.84,2299.16 2539.84,1989.16 v1(2549.84,1979.16)
USB_A5: R6.2 USB.A5 | length 98.6
  Bottom Layer w10: USB.A5@2424.04,1921.56 2424.04,1983.36 R6.2
VBAT: C6.2 C7.2 C10.2 C11.2 C16.2 L1.1 R19.1 U3.6 U6.1 U8.1 U8.3 U11.1 U11.3 | length 2150.2
  Top Layer w10: 2223.24,2014.06 v1(2223.64,2041.8) ; 2488.24,2014.06 v1(2488.24,2041.8)
  Top Layer w20: v3@2001.84,1890.56 2125.34,2014.06 2584.04,2014.06 2666.74,2096.86 v3@2830.24,2096.86 ; v3@2374.84,2034.26 2375.04,2014.06
  Bottom Layer w10: R19.1 1809.84,2120.46 1969.04,1961.26 1969.04,1822.56 U6.1 ; v1(2223.64,2041.8) 2248,2041.8 C10.2 2259.84,2054.06 2259.84,2096.14 U8.3 ; U8.1 2337.24,2055.26 2337.24,2032.56 C11.2 2344.12,2034.24 v3(2374.84,2034.24) 2405.56,2034.24 C7.2 2409.84,2056.06 2409.84,2096.14 U11.3 ; U11.1 2488.24,2097.74 v1(2488.24,2041.8) ; 2488.24,2056.92 v1(2488.24,2041.8) ; C6.2 2488.24,2031.57 v1(2488.24,2041.8)
  Bottom Layer w20: U6.1 1970.23,1858.95 v3(2001.88,1890.6) ; L1.1 2761.85,2165.27 v3(2830.25,2096.87) 2830.25,2040.44 2833.34,2043.53 C16.2
VBUS: C17.2 D1.2 USB.A4 USB.A9 USB.B4 USB.B9 | length 669.3
  Bottom Layer w10: USB.A9 USB.B4 2286.26,1890.98 2347.08,1830.16 2455.44,1830.16 2455.44,1872.92 2463.42,1880.9 USB.B9 USB.A4 ; D1.2 C17.2
  Bottom Layer w20: 2455.44,1830.16 2490.74,1794.86 2550.84,1794.86 D1.2
VSYS: C14.2 D1.1 U3.1 | length 190.9
  Bottom Layer w10: 2670.07,1892.7 2672.11,1892.7 C14.2
  Bottom Layer w20: D1.1 2719.43,1942.06 U3.1@2719.43,1957.88
pads on no net: FPC1.7 FPC1.8 FPC2.7 FPC2.8 SW1. SW1.3 SW1.4 SW2. SW2.3 SW2.4 SW3. SW3.3 SW3.4 SW4.2 SW4.4 U1.10 U1.16 U1.19 U1.21 U1.30 U1.31 U1.39 U2.6 U2.9 U3.4 U3.9 U5.10 U5.11 U6.3 U6.4 U10.9 U10.10 USB. USB.0 USB.1 USB.2 USB.3 USB.A8 USB.B8

## Keep-outs
Keep-Out Layer:
  circle w10 net S$42428: c2374.84,2339.16 r748.03

## Silkscreen, mask and mechanical layers (free items; w line width, h text height)
Bottom Overlay:
  text "TX" at 3699.4,2549.48 h39.37
  text "RX" at 3699.4,2448.48 h39.37
  text "CLK" at 3734.47,2347.48 h39.37
  text "DIO" at 3714.79,2246.48 h39.37
  text "GND" at 3738.05,2145.48 h39.37
  text "3V3" at 3739.84,2044.48 h39.37

## Text inside footprints (layer, text, board x,y; h text height)
U4: Top Overlay "1" at 2719.84,2564.16 h80 r270; Top Overlay "12" at 2804.84,2014.16 h80 r90